# EAGLE board BST_Board (EAGLE 8.6.1)
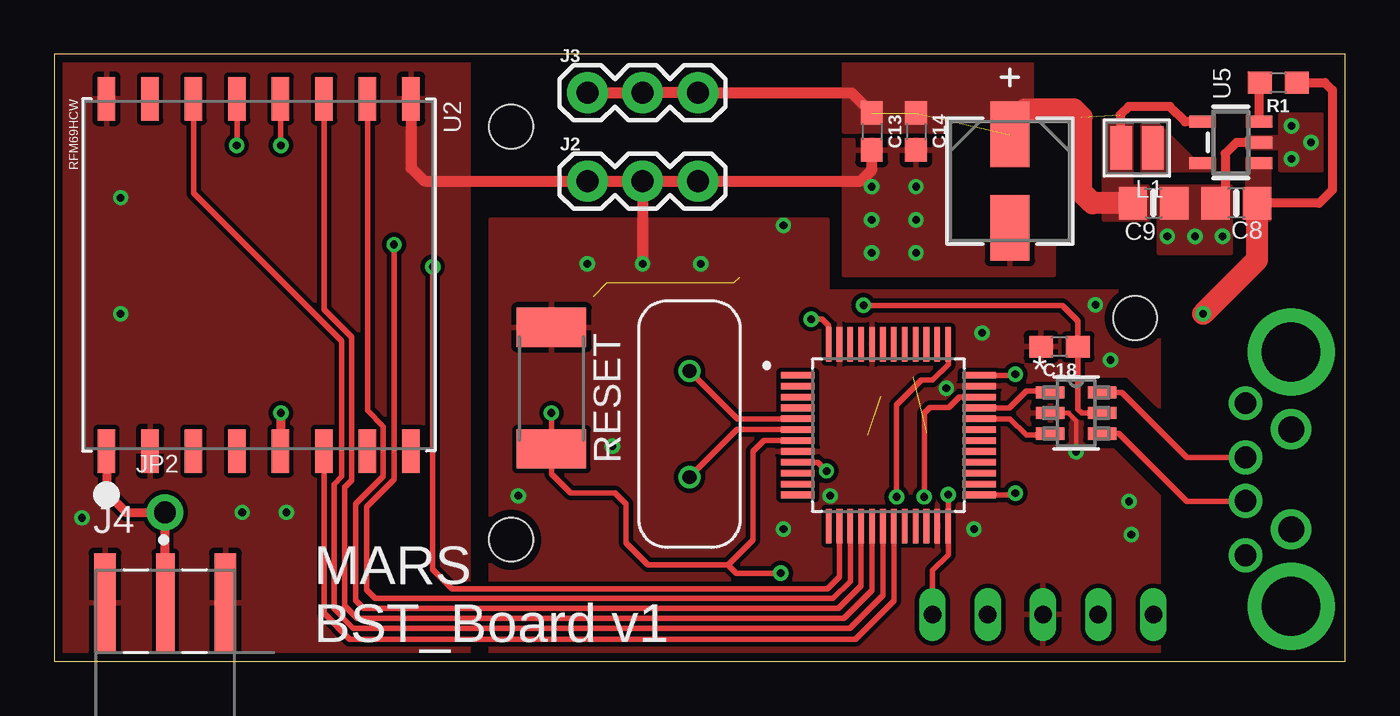
[diagram p0: board, top side]
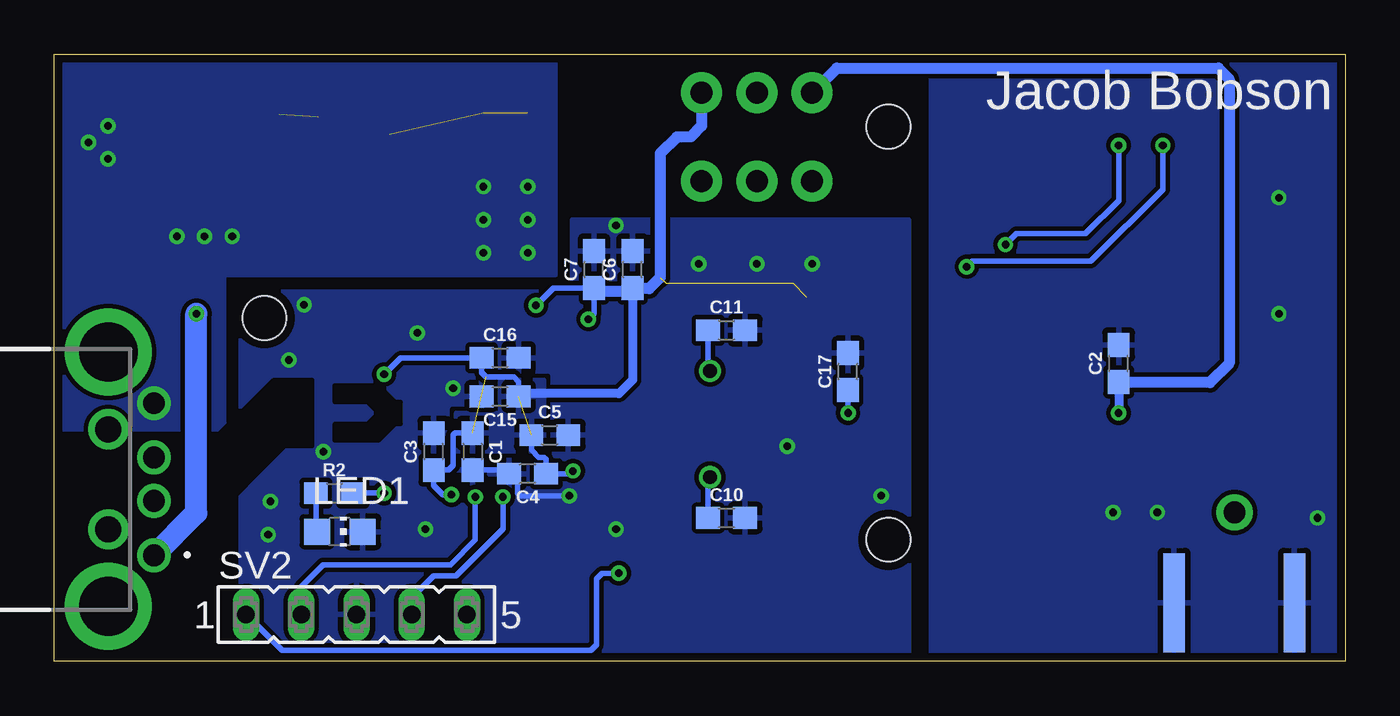
[diagram p1: board, bottom side, seen from below]

Size 59.36 x 27.93 mm. Coordinates in mm from the lower left corner, seen from the top.
Outline: 0,0 59.36,0 59.36,27.93 0,27.93 0,0
Copper layers (1*16): Top 0.0356mm / dielectric 1.5011mm / Bottom 0.0356mm
Design rules "ECE_DRC": minimum track width 8mil, minimum drill 13mil, track to track 8mil, track to pad 8mil, pad to pad 6mil, via to via 8mil, smd to smd 6mil, copper to edge 15mil, drill to drill 8mil, minimum pad ring 7mil, minimum via ring 7mil, stop-mask expansion 3mil, vias tented up to drill 0mil, thermal gap 10mil
Holes 2 mm at 21,24.6 21,5.6 49.7,15.8

## Footprints (pad centres in the part's own frame; a part is rotated, then mirrored left to right if it is on the bottom)
0603 = smd 1.1 x 1: 1 -0.85,0; 2 0.85,0
0805-NO = smd 1.3 x 1.5: 1 -0.95,0; 2 0.95,0
PCAP_5X5.8-ELECT = smd 3.023 x 1.803: 1 -2.146,0; 2 2.146,0
SOT23-6L = smd 1.321 x 0.559: 1 -1.194,0.95; 2 -1.194,0; 3 -1.194,-0.95; 4 1.194,-0.95; 5 1.194,0; 6 1.194,0.95
UP2-AH-1-TH = drill 1 pad 1.55: 1 3.5,19.9; 2 1,19.9; 3 -1,19.9; 4 -3.5,19.9 | drill 1.2 pad 1.85: 5 -2.3,17.8; 6 2.3,17.8 | drill 2.7 pad 4: 7 5.85,17.8; 8 -5.85,17.8
1X03 = drill 1.016 pad 1.88: 1 0,0; 2 2.54,0; 3 5.08,0
TAOGLAS_EMPCB.SMAFSTJ.B.HT = smd 0.85 x 4.56: 1 0,0 | smd 1 x 4.56: SH1 -2.77,0; SH2 2.77,0 | smd 1 x 4.56 bottom: SH3 -2.77,0; SH4 2.77,0
1X01_ROUND = drill 1 pad 1.676: 1 0,0
INDUCTOR_TAIYOYUDEN_NRH2412T = smd 1 x 2: 1 -0.725,0; 2 0.725,0
CHIP-LED0805 = smd 1.2 x 1.2: A 0,-1.05; C 0,1.05
SW_2512 = smd 1.8 x 3.2: 1 -2.8,0; 2 2.8,0
FE05-1 = drill 0.813 long: 1 -5.08,0; 2 -2.54,0; 3 0,0; 4 2.54,0; 5 5.08,0
QFP50P900X900X160-48N = smd 1.56 x 0.28: 1 -4.18,2.75; 2 -4.18,2.25; 3 -4.18,1.75; 4 -4.18,1.25; 5 -4.18,0.75; 6 -4.18,0.25; 7 -4.18,-0.25; 8 -4.18,-0.75; 9 -4.18,-1.25; 10 -4.18,-1.75; 11 -4.18,-2.25; 12 -4.18,-2.75; 25 4.18,-2.75; 26 4.18,-2.25; 27 4.18,-1.75; 28 4.18,-1.25; 29 4.18,-0.75; 30 4.18,-0.25; 31 4.18,0.25; 32 4.18,0.75; 33 4.18,1.25; 34 4.18,1.75; 35 4.18,2.25; 36 4.18,2.75 | smd 0.28 x 1.56: 13 -2.75,-4.18; 14 -2.25,-4.18; 15 -1.75,-4.18; 16 -1.25,-4.18; 17 -0.75,-4.18; 18 -0.25,-4.18; 19 0.25,-4.18; 20 0.75,-4.18; 21 1.25,-4.18; 22 1.75,-4.18; 23 2.25,-4.18; 24 2.75,-4.18; 37 2.75,4.18; 38 2.25,4.18; 39 1.75,4.18; 40 1.25,4.18; 41 0.75,4.18; 42 0.25,4.18; 43 -0.25,4.18; 44 -0.75,4.18; 45 -1.25,4.18; 46 -1.75,4.18; 47 -2.25,4.18; 48 -2.75,4.18
RFMHCW_SMT = smd 2 x 0.8: 1P 8.1,-7; 2P 8.1,-5; 3P 8.1,-3; 4P 8.1,-1; 5P 8.1,1; 6P 8.1,3; 7P 8.1,5; 8P 8.1,7; 9P -8.1,7; 10P -8.1,5; 11P -8.1,3; 12P -8.1,1; 13P -8.1,-1; 14P -8.1,-3; 15P -8.1,-5; 16P -8.1,-7
SOT23-5 = smd 0.55 x 1.2: 1 -0.95,-1.3; 2 0,-1.3; 3 0.95,-1.3; 4 0.95,1.3; 5 -0.95,1.3
XTAL_ECS-80-S-4X = drill 0.63 pad 1.03: 1 -2.44,0; 2 2.44,0

## Placement (x,y rotation side)
C1  0.1uF  [0603]  40.13,9.65 270 bottom
C2  10uF  [0603]  10.41,13.72 90 bottom
C3  1.0uF  [0603]  41.91,9.65 90 bottom
C4  0.1uF  [0603]  37.59,8.64 180 bottom
C5  1.0uF  [0603]  36.58,10.41 0 bottom
C6  0.1uF  [0603]  32.77,18.03 90 bottom
C7  1.0uF  [0603]  34.54,18.03 90 bottom
C8  22uF  [0805-NO]  50.55,21.08 0 top
C9  10uF  [0805-NO]  54.36,21.08 180 top
C10  20pF  [0603]  28.45,6.6 0 bottom
C11  20pF  [0603]  28.45,15.24 0 bottom
C12  UWD0J560MCL1GS  [PCAP_5X5.8-ELECT]  43.94,22.1 270 top
C13  1.0uF  [0603]  37.59,24.38 270 top
C14  0.1uF  [0603]  39.62,24.38 270 top
C15  0.1uF  [0603]  38.86,12.19 180 bottom
C16  1.0uF  [0603]  38.86,13.97 0 bottom
C17  0.1uF  [0603]  22.86,13.34 90 bottom
C18  0.1uF  [0603]  46.23,14.48 180 top
CR1  USBLC6-2SC6  [SOT23-6L]  46.99,11.43 0 top
J1  UP2-AH-1-TH  [UP2-AH-1-TH]  74.68,8.38 270 bottom
J2  [1X03]  24.51,22.1 0 top
J3  [1X03]  24.51,26.16 0 top
J4  EMPCB.SMAFSTJ.B.HT  [TAOGLAS_EMPCB.SMAFSTJ.B.HT]  5.1,2.7 0 top
JP2  [1X01_ROUND]  5.08,6.86 0 top
L1  2.2uH/NRH2412T2R2MNGH  [INDUCTOR_TAIYOYUDEN_NRH2412T]  49.78,23.62 180 top
LED1  [CHIP-LED0805]  46.23,5.97 270 bottom
R1  100k  [0603]  56.29,26.63 180 top
R2  1k  [0603]  46.48,7.75 0 bottom
RESET  [SW_2512]  22.86,12.57 270 top
SV2  [FE05-1]  45.47,2.16 0 bottom
U1  STM32L053C8T6  [QFP50P900X900X160-48N]  38.35,10.41 0 top
U2  RFM69HCW  [RFMHCW_SMT]  9.4,17.78 270 top
U5  LM3671MF-3.3/NOPB  [SOT23-5]  54.1,23.88 90 top
Y1  ECS-80-S-4X  [XTAL_ECS-80-S-4X]  29.21,10.92 90 top

## Library data of the parts
C1 C4 C6 C14 C15 C18 = SparkFun-Capacitors; PROD_ID: CAP-00810
C2 = SparkFun-Capacitors; PROD_ID: CAP-11015
C3 C5 C7 C13 C16 = SparkFun-Capacitors; PROD_ID: CAP-00868
C8 C9 JP2 L1 U2 U5 = microbuilder
C10 C11 C17 = SparkFun-Capacitors; PROD_ID: CAP-08280
C12 = 56uF_Cap_6.3v; BUILT_BY: EMA_UL_Team; MANUFACTURER_PART_NUMBER: UWD0J560MCL1GS; VENDOR: Nichicon
CR1 = ESD_Protection; BUILT_BY: EMA_UL_Team; MANUFACTURER_PART_NUMBER: USBLC6-2SC6; VENDOR: STMicroelectronics
J1 = USB_Con; DESCRIPTION: USB Connectors USB 2.0 type A plug 4 pin Horizontal TH; HEIGHT: mm; MANUFACTURER_NAME: CUI; MANUFACTURER_PART_NUMBER: UP2-AH-1-TH; MOUSER_PART_NUMBER: 490-UP2-AH-1-TH; MOUSER_PRICE-STOCK: https://www.mouser.com/Search/Refine.aspx?Keyword=490-UP2-AH-1-TH
J2 J3 = SparkFun-Connectors
J4 = EMPCB.SMAFSTJ.B.HT; DESCRIPTION: SMA Connector Jack, Female Socket 50Ohm Board Edge, End Launch Solder; DIGI-KEY_PART_NUMBER: 931-1175-ND; DIGI-KEY_PURCHASE_URL: https://www.digikey.com/product-detail/en/taoglas-limited/EMPCB.SMAFSTJ.B.HT/931-1175-ND/3522337?utm_source=snapeda&utm_medium=aggregator&utm_campaign=symbol; MF: Taoglas Limited; MP: EMPCB.SMAFSTJ.B.HT; PACKAGE: None
LED1 = led; SPICEPREFIX: L
R1 = SparkFun-Resistors; PROD_ID: RES-07828
R2 = SparkFun-Resistors; PROD_ID: RES-07856
RESET = DiscreteComponents
SV2 = con-lsta; OC_FARNELL: unknown; OC_NEWARK: unknown
U1 = STM32L053C8T6; DESCRIPTION: ARM® Cortex®-M0+ STM32L0 Microcontroller IC 32-Bit 32MHz 64KB _64K x 8_ FLASH 48-LQFP _7x7_; DIGI-KEY_PART_NUMBER: 497-14906-ND; DIGI-KEY_PURCHASE_URL: https://www.digikey.com/product-detail/en/stmicroelectronics/STM32L053C8T6/497-14906-ND/4935255?utm_source=snapeda&utm_medium=aggregator&utm_campaign=symbol; MF: STMicroelectronics; MP: STM32L053C8T6; PACKAGE: LQFP-48 STMicroelectronics
Y1 = ECS-80-S-4X; DESCRIPTION: Crystal 8MHz Series 2-Pin HC-49/U; DIGI-KEY_PART_NUMBER: X1057-ND; DIGI-KEY_PURCHASE_URL: https://www.digikey.com/product-detail/en/ecs-inc/ECS-80-S-4X/X1057-ND/827549?utm_source=snapeda&utm_medium=aggregator&utm_campaign=symbol; MF: ECS International; MP: ECS-80-S-4X; PACKAGE: HC-49/US ECS International

## Nets
3.3V: C1.1 C2.1 C3.1 C4.1 C5.1 C6.1 C7.1 C8.1 C12.1 C13.1 C14.1 C15.1 C16.1 C18.1 CR1.5 J3.1 J3.2 J3.3 L1.2 SV2.5 U1.9 U1.24 U1.36 U1.48 U2.5P U5.4
5V: C9.1 J1.1 R1.1 U5.1
CS: U1.14 U2.13P
DIO0: U1.19 U2.6P
DIO1: U2.7P
DIO2: U2.8P
DIO3: U2.3P
DIO4: U2.4P
DIO5: U2.15P
EN: R1.2 U5.3
GND: C1.2 C2.2 C3.2 C4.2 C5.2 C6.2 C7.2 C8.2 C9.2 C10.2 C11.2 C12.2 C13.2 C14.2 C15.2 C16.2 C17.2 C18.2 CR1.2 J1.4 J2.1 J2.2 J2.3 J4.SH1 J4.SH2 J4.SH3 J4.SH4 LED1.C RESET.1 SV2.3 U1.8 U1.23 U1.35 U1.44 U1.47 U2.2P U2.9P U2.16P U5.2
N$1: J4.1 JP2.1 U2.1P
N$2: L1.1 U5.5
N$3: R2.2 U1.25
N$4: LED1.A R2.1
NRST: C17.1 RESET.2 SV2.1 U1.7
OSC_IN: C11.1 U1.5 Y1.2
OSC_OUT: C10.1 U1.6 Y1.1
RST: U1.18 U2.14P
SPI1_MISO: U1.16 U2.10P
SPI1_MOSI: U1.17 U2.11P
SPI1_SCK: U1.15 U2.12P
SWCLK: SV2.4 U1.37
SWDIO: SV2.2 U1.34
USB_DM: CR1.4 J1.2
USB_DM_3V3: CR1.3 U1.32
USB_DP: CR1.6 J1.3
USB_DP_3V3: CR1.1 U1.33

## Tracks (layer width: path | path; a pad name or v marks a point on that pad's centre or on a via)
3.3V  (via drill 0.35)  (8 unrouted)
  Top 0.254: CR1.5 47.24,11.43 47.08,11.6 C18.1 47.08,15.66 46.35,16.38 v37.21,16.38 | U1.9 35.11,9.16 v35.51,8.76 | v41.1,7.67 v41.1,7.66 U1.24 41.1,4.91 40.39,4.19 SV2.5 | U1.48 35.6,15.45 35.31,15.75 v34.8,15.75 | v44.2,13.21 44.15,13.16 U1.36
  Top 0.406: v10.41,11.43 10.41,9.7 U2.5P | U5.4 52.01,24.83 51.31,25.53 49.4,25.53 49.02,25.15 49.02,23.66 L1.2
  Top 0.508: C13.1 36.66,26.16 J3.3 J3.2 J3.1
  Top 1.016: C8.1 47.74,21.08 47.23,21.59 47.23,25.05 46.89,25.39 44.65,25.39 44.31,25.05 44.31,24.61 C12.1
  Bottom 0.254: C15.1 38.01,12.32 38.01,12.87 38.23,13.08 39.5,13.08 39.71,13.3 C16.1 43.43,13.97 v44.2,13.21 | C1.1 40.93,10.5 41.02,10.41 41.02,9.02 41.24,8.8 C3.1 41.91,8.1 41.48,7.67 v41.1,7.67 | C5.1 37.43,9.74 37.08,9.4 36.83,9.4 36.74,9.31 C4.1 35.64,8.64 v35.51,8.76 | v34.8,15.75 34.54,16 34.54,17.02 C7.1 36.41,17.18 v37.21,16.38 | C6.1 32.77,17.02
  Bottom 0.406: C2.1 v10.41,11.43 | C6.1 32.77,12.95 33.4,12.32 38.01,12.32
  Bottom 0.508: J3.3 29.59,24.64 30.1,24.13 30.73,24.13 31.5,23.37 31.5,17.65 32,17.14 32.64,17.14 32.77,17.02 | C6.1 32.93,17.02 34.54,17.02 | J3.1 23.38,27.3 5.83,27.3 5.33,26.8 5.33,13.72 6.22,12.83 10.38,12.83 C2.1
  pour Bottom: 36.83,10.16 36.83,12.95 38.86,12.95 38.86,11.43 40.89,11.43 40.89,9.65 36.83,9.65
  pour Top (no thermals): 36.32,27.94 36.32,24.38 44.96,24.38 44.96,27.94
  pour Top (no thermals): 48.26,24.89 48.26,20.32 50.29,20.32 50.29,21.84 49.53,21.84 49.53,24.89
5V  (via drill 0.35)
  Top 0.406: R1.1 58.44,26.63 58.78,26.29 58.78,21.69 58.17,21.08 C9.1
  Top 1.016: C9.1 55.31,18.48 v52.83,16
  Bottom 1.016: J1.1 52.83,6.83 v52.83,16
  pour Top (no thermals): 54.86,20.32 54.86,23.11 55.88,23.11 55.88,20.32
CS  (via drill 0.35)
  Top 0.254: U1.14 36.1,3.9 35.56,3.35 18.29,3.35 17.4,4.24 v17.4,18.16 | U2.13P 8.4,23.77 v8.38,23.75
  Bottom 0.254: v8.38,23.75 8.38,21.72 11.68,18.41 17.14,18.41 v17.4,18.16
CUTOUT_USB1
  cutout Bottom: 47.5,12.95 47.5,9.91 48.77,9.91 52.32,6.35 55.63,6.35 55.63,10.41 51.82,10.41 49.28,12.95
  cutout Top: 47.5,9.91 48.77,9.91 52.32,6.35 55.63,6.35 55.63,10.41 51.82,10.41 49.28,12.95 47.5,12.95
CUTOUT_USB2
  cutout Bottom: 46.48,10.92 44.96,10.92 44.45,11.43 44.96,11.94 46.48,11.94 46.48,12.7 44.45,12.7 43.69,11.94 43.43,11.94 43.43,10.92 43.69,10.92 44.45,10.16 46.48,10.16
DIO0
  Top 0.254: U1.19 38.6,2.79 36.83,1.02 13.59,1.02 12.4,2.21 U2.6P
EN
  Top 0.406: U5.3 55.4,26.59 R1.2
GND  (via drill 0.35)
  Top 0.203: CR1.2 46.63,11.43 46.99,11.07 v46.99,9.65
  Top 0.406: U5.2 54.36,23.88 53.85,23.37 53.85,21.52 C9.2
  Top 0.508: U2.9P 16.4,22.72 17.02,22.1 J2.1 J2.2 | J2.2 J2.3 37.08,22.1 37.59,22.61 C13.2 | J2.2 v27.05,18.29
  Bottom 0.254: 38.61,8.8 C1.2 | C4.2 38.05,8.25 38.05,7.75 37.92,7.62 v35.69,7.62 | C3.2 41.78,10.63
  other vias: 24.51,18.29 29.72,18.29 47.88,16.4 48.58,13.87 42.67,15.11 41.02,12.57 33.53,20.07 1.27,6.6 8.64,6.86 10.67,6.86 21.34,7.62 25.65,9.91 3.05,21.34 3.05,16 37.59,20.32 49.43,7.37 33.53,6.1 37.59,21.84 39.62,21.84 51.18,19.56 53.72,19.56 56.9,24.64 57.78,23.88 56.9,23.11 37.59,18.8 39.62,18.8 39.62,20.32 52.45,19.56 49.53,5.84 42.29,6.1
  pour Bottom (rank 4): 20.07,20.32 20.07,0 50.8,0 50.8,17.02 35.56,17.02 35.56,20.32
  pour Top (rank 4): 20.07,20.32 20.07,0 50.8,0 50.8,17.02 35.56,17.02 35.56,20.32
  pour Bottom (rank 4): 0,27.94 0,0 19.05,0 19.05,27.94
  pour Top (rank 4): 0,27.94 0,0 19.05,0 19.05,27.94
  pour Bottom (no thermals): 36.32,17.78 51.56,17.78 51.56,10.67 59.44,10.67 59.44,27.94 36.32,27.94
  pour Top (rank 4): 36.32,27.94 36.32,17.78 45.97,17.78 45.97,27.94
  pour Top (no thermals): 50.8,21.84 50.8,18.8 54.1,18.8 54.1,21.84
  pour Top (no thermals): 54.86,24.13 56.39,24.13 56.39,25.15 58.29,25.15 58.29,22.61 56.39,22.61 56.39,23.62 54.86,23.62
N$1
  Top 0.406: U2.1P 2.4,7.76 3.3,6.86 JP2.1 5.08,2.72 J4.1
N$2
  pour Top (no thermals): 53.34,22.61 50.04,22.61 50.04,24.64 50.8,24.64 52.32,23.11 53.34,23.11
N$3  (via drill 0.35)
  Top 0.254: U1.25 44.11,7.66 v44.2,7.75
  Bottom 0.254: v44.2,7.75 R2.2
N$4
  Bottom 0.254: R2.1 47.33,6.02 LED1.A
NRST  (via drill 0.35)
  Top 0.254: 30.99,4.45 27.3,4.45 26.29,5.46 26.29,7.24 25.78,7.75 23.75,7.75 22.86,8.64 RESET.2 v22.86,11.43 | 30.99,4.45 32.13,5.59 32.13,9.65 32.64,10.16 U1.7 | 30.99,4.45 31.37,4.06 v33.4,4.06
  Bottom 0.254: v33.4,4.06 34.16,4.06 34.42,3.81 34.42,0.76 34.67,0.51 48.9,0.51 SV2.1 | C17.1 v22.86,11.43
OSC_IN
  Top 0.254: U1.5 31.41,11.16 Y1.2
  Bottom 0.254: C11.1 29.3,13.45 Y1.2
OSC_OUT
  Top 0.254: U1.6 31.39,10.66 Y1.1
  Bottom 0.254: C10.1 29.3,8.39 Y1.1
RST
  Top 0.254: U1.18 38.1,3.05 36.58,1.52 18.29,1.52 13.74,1.52 12.86,2.41 12.86,8.16 13.21,8.51 13.21,14.73 6.4,21.54 U2.14P
SPI1_MISO
  Top 0.254: U1.16 37.1,3.47 36.07,2.44 14.22,2.44 13.84,2.82 13.84,7.24 15.13,8.52 15.13,10.82 14.4,11.55 U2.10P
SPI1_MOSI
  Top 0.254: U1.17 37.6,3.26 36.32,1.98 13.93,1.98 13.36,2.56 13.36,8.01 13.66,8.32 13.66,14.92 12.4,16.19 U2.11P
SPI1_SCK  (via drill 0.35)
  Top 0.254: U1.15 36.6,3.69 35.81,2.9 14.76,2.9 14.36,3.3 14.36,7.11 15.62,8.37 v15.62,19.18 | U2.12P 10.4,23.77 v10.41,23.75
  Bottom 0.254: v10.41,23.75 10.41,21.21 11.94,19.68 15.11,19.68 v15.62,19.18
SWCLK  (via drill 0.35)
  Top 0.254: U1.37 41.1,13.67 40.39,12.95 39.88,12.95 38.73,11.81 v38.73,7.57
  Bottom 0.254: v38.73,7.57 38.73,6.1 40.89,3.94 41.91,3.94 42.93,2.92 SV2.4
SWDIO  (via drill 0.35)
  Top 0.254: v40.01,7.57 40.01,11.43 40.26,11.68 41.15,11.68 41.63,12.16 U1.34
  Bottom 0.254: v40.01,7.57 40.01,5.59 41.15,4.45 46.99,4.45 48.01,3.43 SV2.2
USB_DM
  Top 0.254: CR1.4 48.96,10.48 52.07,7.37 54.76,7.37 J1.2
USB_DM_3V3
  Top 0.254: U1.32 43.95,11.16 44.7,10.41 45.73,10.41 CR1.3
USB_DP
  Top 0.254: CR1.6 49.09,12.38 52.07,9.4 54.76,9.4 J1.3
USB_DP_3V3
  Top 0.254: U1.33 43.92,11.66 44.7,12.45 45.73,12.45 CR1.1

## Text on the board
tNames: MARS / BST_Board v1
bNames: Jacob Bobson